# Altium PCB SIMPTON_PCB.PcbDoc
Units mm, origin at the board's own origin, x right, y up, seen from the top; angles counter-clockwise.
Board outline 97.8 x 50 mm, 2 copper layers (Top Layer, Bottom Layer); 60 components, 50 nets, 233 pads, 475 vias.
Unrouted connection lines stored in the file: 144.
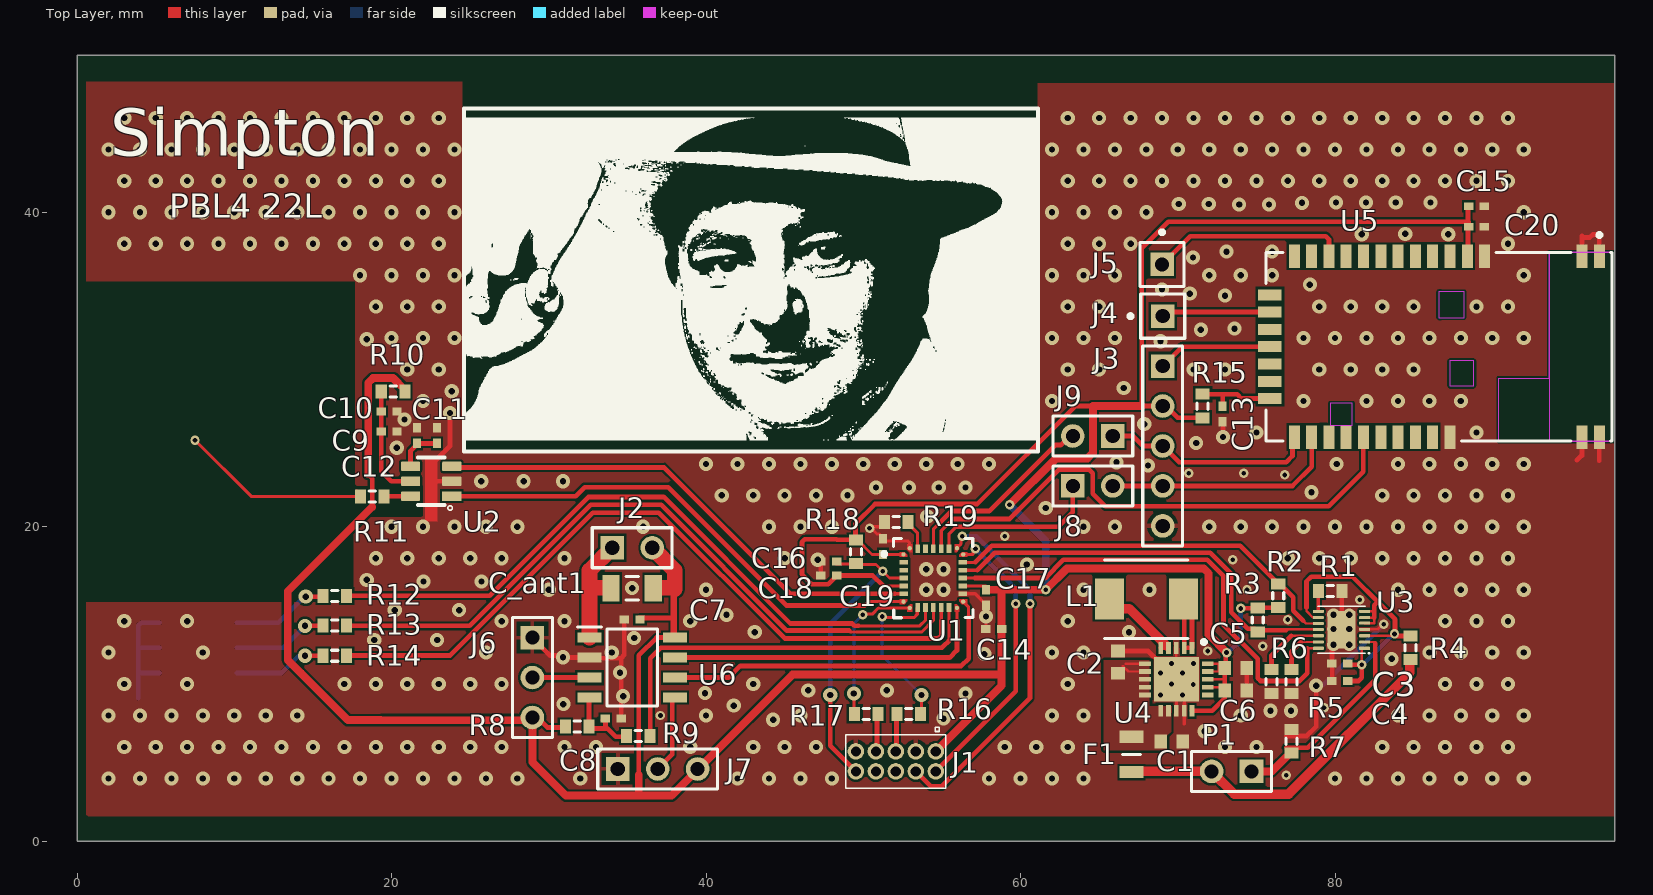
[diagram p0: Top Layer view]
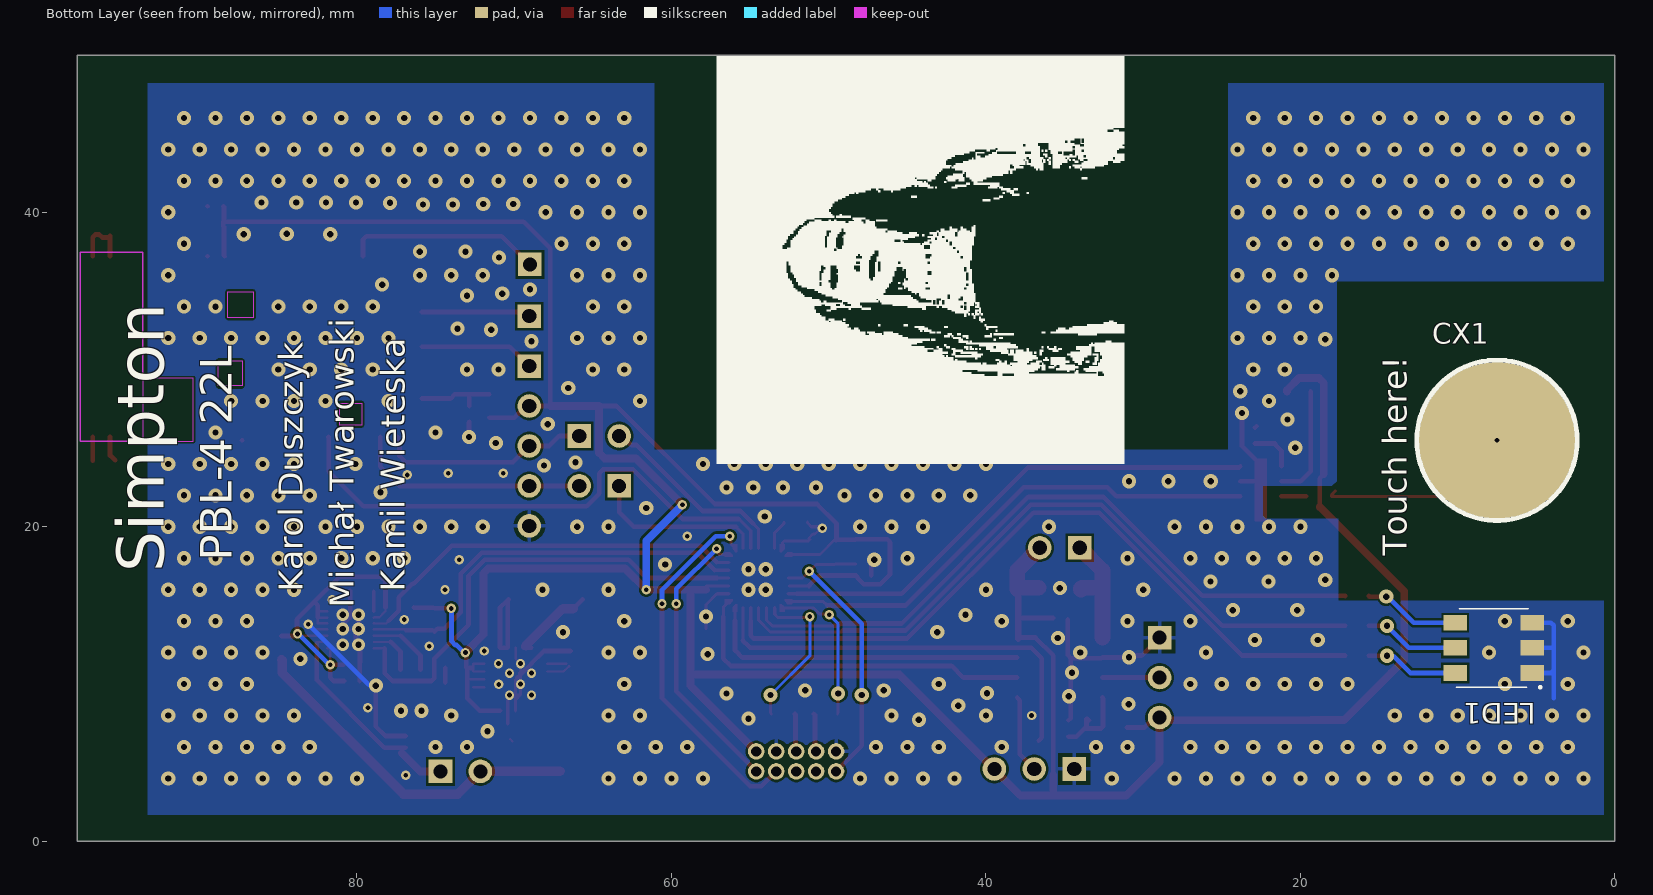
[diagram p1: Bottom Layer view, seen from below]

## Layer stack, top to bottom
Top Solder: solder mask 0.0102, Solder Resist, Dk 3.5
Top Layer: signal copper 0.0356
Dielectric 1: dielectric 0.32, FR-4, Dk 4.8
Bottom Layer: signal copper 0.0356
Bottom Solder: solder mask 0.0102, Solder Resist, Dk 3.5

## Board outline
0,0 0,50 97.8,50 97.8,0

## Design rules (kind name [scope] priority, off if disabled: settings)
Clearance [All] p1: gap=0.15 ignorepadtopadclearanceinfootprint=TRUE except(0: Arc-Hole Track-Hole SMDPad-Hole THPad-Hole Via-Hole Fill-Hole Poly-Hole Region-Hole Text-Hole)
PolygonConnect [All] p1: thpad.connectstyle=Relief thpad.reliefconductorwidth=0.254 thpad.reliefentries=4 thpad.polygonreliefangle="90 Angle" thpad.airgapwidth=0.254 smdpad.connectstyle=Direct smdpad.reliefconductorwidth=0.254 smdpad.reliefentries=4 smdpad.polygonreliefangle="90 Angle" smdpad.airgapwidth=0.254 via.connectstyle=Direct via.reliefconductorwidth=0.254 via.reliefentries=4 via.polygonreliefangle="90 Angle" via.airgapwidth=0.254
RoutingVias [All] p1: holewidth=0.711 width=1.27 viastyle="Through Hole" minholewidth=0.711 minwidth=1.27 maxholewidth=0.711 maxwidth=1.27
SolderMaskExpansion [All] p1: expansion=0.102 istentingtop=FALSE
Width [All] p1: maxlimit=1 minlimit=0.15 preferedwidth=0.3 minimp=50.000000 maximp=50.000000 favimp=50.000000
30 further rules are at their usual default settings.

## Components (designator, comment, footprint, x,y, rotation, side; value= is the part's Value field where it differs from the comment)
C1 "Cap Semi" 1608[0603] 69.61,6.35 r0 top value=10u
C2 "Cap Semi" 1608[0603] 66.2,11.4 r90 top value=10u
C3 "Cap Semi" 0402 80.3,11.3 r180 top value=100n
C4 "Cap Semi" 0402 80.3,10.2 r180 top value=470n
C5 "Cap Semi" 1608[0603] 73.685,11.025 r0 top value=22u
C6 "Cap Semi" 1608[0603] 73.675,9.6 r0 top value=22u
C7 "Cap Semi" 0402 35.3,14.1 r0 top value=100n
C8 "Cap Semi" 0402 34.1,7.8 r180 top value=220n
C9 "Cap Semi" 0402 19.845,26.072 r0 top value=1u
C10 "Cap Semi" 0402 19.845,27.341 r0 top value=100p
C11 "Cap Semi" 0402 22.895,25.8 r90 top value=1u
C12 "Cap Semi" 0402 21.625,25.8 r90 top value=100p
C13 "Cap Semi" 0402 72.85,27.18 r270 top value=1u
C14 "Cap Semi" 0402 58.3,13.5 r180 top value=2u2
C15 "Cap Semi" 0402 89,40.385 r0 top value=1u
C16 "Cap Semi" 0402 47.8,17.8 r180 top value=100n
C17 "Cap Semi" 0402 57.8,15.5 r270 top value=100n
C18 "Cap Semi" 0402 47.8,16.9 r180 top value=100n
C19 "Cap Semi" 0402 51.255,18.74 r90 top value=100n
C20 "Cap Semi" 0402 89,39.085 r0 top value=100n
C_ant1 "Cap Semi" C1206 35.3,16.1 r180 top value=100p
CX1 "KD_electrode" KD_ELECTRODE 7.5,25.5 r0 bottom
F1 "MF-PSHT010KX-2" FUSC2214X120N 67.05,5.525 r90 top
J1 "JTAG header" KD_JTAG_header 52.07,5.08 r180 top
J2 "ANTENNA" HDR1X2 34.036,18.669 r0 top
J3 "Header 5" HDR1X5 69.04,30.22 r270 top
J4 "Pad" PIN1 69.04,33.395 r90 top
J5 "Pad" PIN1 69,36.685 r0 top
J6 "Zworka SPEED" HDR1X3 28.956,12.954 r270 top
J7 "Zworka MODE" HDR1X3 34.385,4.6 r0 top
J8 "Zworka TX" HDR1X2 63.325,22.6 r0 top
J9 "Zworka RX" HDR1X2 65.865,25.775 r180 top
L1 "MPX1D0520L1R0" INDPM5350X200N 68,15.4 r180 top
LED1 "RGB LED PLCC-6" 5050 7.7,12.3 r180 bottom
P1 "BATT" HDR1X2 74.69,4.445 r180 top
R1 "Res3" J1-0603 79.685,15.925 r0 top value=100k
R2 "Res3" J1-0603 76.385,15.625 r270 top value=1k2
R3 "Res3" J1-0603 75.085,14.075 r90 top value=1k2
R4 "Res3" J1-0603 84.8,12.3 r90 top value=10
R5 "Res3" J1-0603 77.23,10.16 r270 top value=100k
R6 "Res3" J1-0603 75.96,10.16 r90 top value=100k
R7 "Res3" J1-0603 77.23,6.35 r90 top value=20m
R8 "Res3" J1-0603 31.8,7.3 r180 top value=100k
R9 "Res3" J1-0603 35.7,6.7 r180 top value=19k
R10 "Res3" J1-0603 20.095,28.611 r0 top value=42R2
R11 "Res3" J1-0603 18.77,21.932 r180 top value=470
R12 "Res3" J1-0603 16.4,15.6 r180 top value=110
R13 "Res3" J1-0603 16.4,13.716 r180 top value=160
R14 "Res3" J1-0603 16.4,11.8 r180 top value=80
R15 "Res3" J1-0603 71.58,27.68 r270 top value=4k7
R16 "Res3" J1-0603 52.9,8.1 r0 top value=100
R17 "Res3" J1-0603 50.2,8.1 r180 top value=100
R18 "Res3" J1-0603 49.53,18.415 r270 top value=100k
R19 "Res3" J1-0603 52.1,20.3 r0 top value=100k
U1 "STM32L031G6U7" FP-UFQFPN28-A0B0-MFG 54.455,16.74 r0 top
U2 "IQS227AS/B" KD_TSOT23-6 22.52,22.897 r90 top
U3 "MAX17201G+" KW_TDFN14 80.41,13.45 r180 top
U4 "ISL91110IRNZ-T7A" QFN50P400X400X100-21N 69.91,10.3 r270 top
U5 "RN4870-V/RM118" FP-RN4870-V-RM118-MFG 86.61,31.455 r270 top
U6 "MLX90109CDC-AAA-000-SP" SOIC127P600X172-8N 35.306,11.049 r0 top

## Footprints (in the part's own frame and the unit in brackets; to place one, negate y for a bottom-side part, rotate by r counter-clockwise, add the part's x,y. Pads: shape width x height; smd on the part's side, far side on the other; paste and mask are expansions set on the pad)
0402 [mm] "Chip Capacitor, Body 1.0x0.5mm, IPC High Density"
  rect 0.6x0.5 smd: 1(-0.5,0) 2(0.5,0)
  body extent -0.55,-0.3 0.55,0.3, height 1.3
1608[0603] [mm] "Chip Capacitor, Body 1.6x0.8mm, IPC High Density"
  rect 0.8x0.9 smd: 1(-0.7,0) 2(0.7,0)
  body extent -0.87,-0.48 0.87,0.48, height 1.3
5050 [mm]
  rect 1.5x1 smd: 1(2.45,-1.6) 2(2.45,0) 3(2.45,1.6) 4(-2.45,1.6) 5(-2.45,0) 6(-2.45,-1.6)
  silkscreen extent -2.4,-2.55 3,2.5, body extent -2.5,-2.5 2.5,2.5, height 2.1
C1206 [mm] "Chip Capacitor, Body 3.2x1.6mm, IPC High Density"
  rect 1.1x1.7 smd: 1(-1.35,0) 2(1.35,0)
  silkscreen extent -0.4,-0.75 0.4,0.75, body extent -1.7,-0.9 1.7,0.9, height 1.3
FP-RN4870-V-RM118-MFG [mm]
  rect 1.5x0.7 smd paste+0 mask+0: 1(-5.75,10.2) 2(-5.75,9.1) 3(-5.75,2.9) 4(-5.75,1.8) 5(-5.75,0.7) 6(-5.75,-0.4) 7(-5.75,-1.5) 8(-5.75,-2.6) 9(-5.75,-3.7) 10(-5.75,-4.8) 11(-5.75,-5.9) 12(-5.75,-7) 13(-5.75,-8.1) 14(-5.75,-9.2) 22(5.75,-9.2) 23(5.75,-8.1) 24(5.75,-7) 25(5.75,-5.9) 26(5.75,-4.8) 27(5.75,-3.7) 28(5.75,-2.6) 29(5.75,-1.5) 30(5.75,-0.4) 31(5.75,0.7) 32(5.75,9.1) 33(5.75,10.2)
  rect 0.7x1.5 smd paste+0 mask+0: 15(-3.3,-10.75) 16(-2.2,-10.75) 17(-1.1,-10.75) 18(0,-10.75) 19(1.1,-10.75) 20(2.2,-10.75) 21(3.3,-10.75)
  Keep-Out Layer region: -6,7 6,7 6,11 -6,11
  Keep-Out Layer region: -3.5,0 -1.85,0 -1.85,1.6 -3.5,1.6
  Keep-Out Layer region: 3.6,-6.9 5,-6.9 5,-5.5 3.6,-5.5
  Keep-Out Layer region: 0.9,0.7 2.5,0.7 2.5,2.2 0.9,2.2
  Keep-Out Layer region: -6,11 6,11 6,3.8 2,3.8 2,7 -6,7 -6,11
  silkscreen extent -7.22,-11 6,11, body extent -6.6,-11.6 6.6,11.1, height 0.25
FP-UFQFPN28-A0B0-MFG [mm]
  round 0.27 smd paste+0 mask+0: 1(-1.9,1.5) 7(-1.9,-1.5) 8(-1.5,-1.9) 14(1.5,-1.9) 15(1.9,-1.5) 21(1.9,1.5) 22(1.5,1.9) 28(-1.5,1.9)
  rect 0.55x0.3 smd paste+0 mask+0: 2(-1.875,1) 3(-1.875,0.5) 4(-1.875,0) 5(-1.875,-0.5) 6(-1.875,-1) 16(1.875,-1) 17(1.875,-0.5) 18(1.875,0) 19(1.875,0.5) 20(1.875,1)
  rect 0.3x0.55 smd paste+0 mask+0: 9(-1,-1.875) 10(-0.5,-1.875) 11(0,-1.875) 12(0.5,-1.875) 13(1,-1.875) 23(1,1.875) 24(0.5,1.875) 25(0,1.875) 26(-0.5,1.875) 27(-1,1.875)
  Top Layer region: -1.65,1.35 -1.65,1.48 -1.82,1.65 -2.15,1.65 -2.15,1.35 -1.65,1.35
  Top Layer region: -1.35,1.65 -1.48,1.65 -1.65,1.82 -1.65,2.15 -1.35,2.15 -1.35,1.65
  Top Layer region: -1.65,-1.35 -1.65,-1.48 -1.82,-1.65 -2.15,-1.65 -2.15,-1.35 -1.65,-1.35
  Top Layer region: 1.35,-1.65 1.48,-1.65 1.65,-1.82 1.65,-2.15 1.35,-2.15 1.35,-1.65
  Top Layer region: 1.65,-1.35 1.65,-1.48 1.82,-1.65 2.15,-1.65 2.15,-1.35 1.65,-1.35
  Top Layer region: 1.65,1.35 1.65,1.48 1.82,1.65 2.15,1.65 2.15,1.35 1.65,1.35
  Top Layer region: 1.35,1.65 1.48,1.65 1.65,1.82 1.65,2.15 1.35,2.15 1.35,1.65
  Top Layer region: -1.35,-1.65 -1.48,-1.65 -1.65,-1.82 -1.65,-2.15 -1.35,-2.15 -1.35,-1.65
  silkscreen extent -3.25,-2.52 2.52,2.52, body extent -2.25,-2.25 2.25,2.25, height 0.25
FUSC2214X120N [mm]
  rect 0.77x1.52 smd: 1(-1.125,0) 2(1.125,0)
  silkscreen extent 0,-0.58 0,0.58, body extent -1.07,-0.67 1.07,0.67, height 1.2
HDR1X2 [mm] "Connector; Header; 2 Position"
  rect 1.5x1.5 hole 0.9: 1(0,0)
  round 1.5 hole 0.9: 2(2.54,0)
  silkscreen extent -1.27,-1.27 3.81,1.27
HDR1X3 [mm] "Connector; Header; 3 Position"
  rect 1.5x1.5 hole 0.9: 1(0,0)
  round 1.5 hole 0.9: 2(2.54,0) 3(5.08,0)
  silkscreen extent -1.27,-1.27 6.35,1.27
HDR1X5 [mm] "Connector; Header; 5 Position"
  rect 1.5x1.5 hole 0.9: 1(0,0)
  round 1.5 hole 0.9: 2(2.54,0) 3(5.08,0) 4(7.62,0) 5(10.16,0)
  silkscreen extent -1.27,-1.27 11.43,1.27
INDPM5350X200N [mm]
  rect 1.85x2.6 smd: 1(-2.35,0) 2(2.35,0)
  silkscreen extent -2.65,-2.5 2.65,2.5, body extent -2.75,-0.04 2.75,1.96, height 2.6
J1-0603 [mm] "Chip Resistor, Body 1.6x0.8mm, IPC High Density"
  rect 0.7x0.9 smd: 1(-0.75,0) 2(0.75,0)
  silkscreen extent -0.2,-0.35 0.2,0.35, body extent -0.85,-0.48 0.85,0.48, height 0.9
KD_ELECTRODE [mm]
  round 10 smd: CX(0,0)
  silkscreen extent -5.1,-5.1 5.1,5.1
KD_JTAG_header [mm]
  round 1.05 hole 0.65: 1(-2.54,-0.635) 2(-2.54,0.635) 3(-1.27,-0.635) 4(-1.27,0.635) 5(0,-0.635) 6(0,0.635) 7(1.27,-0.635) 8(1.27,0.635) 9(2.54,-0.635) 10(2.54,0.635)
  silkscreen extent -3.18,-2.16 3.18,1.7
KD_TSOT23-6 [mm]
  rect 0.62x1.22 smd: 1(-0.95,-1.31)
  rrect25% 0.62x1.22 smd: 2(0,-1.31) 3(0.95,-1.31) 4(0.95,1.31) 5(0,1.31) 6(-0.95,1.31)
  silkscreen extent -1.84,-1.34 1.5,0.85
KW_TDFN14 [mm]
  rrect50% 0.7x0.2 smd: 1(-1.475,1.175) 2(-1.475,0.775) 3(-1.475,0.375) 4(-1.475,-0.025) 5(-1.475,-0.425) 6(-1.475,-0.775) 7(-1.475,-1.175) 8(1.475,1.175) 9(1.475,0.775) 10(1.475,0.375) 11(1.475,-0.025) 12(1.475,-0.4) 13(1.475,-0.775) 14(1.475,-1.175)
  rrect10% 1.8x2.4 smd: 15(0,0)
  silkscreen extent -1.79,-1.5 1.5,1.54
PIN1 [mm] "Connector; Plug"
  rect 1.5x1.5 hole 0.9: 1(0,0)
  silkscreen extent -1.4,-1.4 1.4,2.17
QFN50P400X400X100-21N [mm]
  rect 0.75x0.3 smd: 1(-2,1) 2(-2,0.5) 3(-2,0) 4(-2,-0.5) 5(-2,-1) 11(2,-1) 12(2,-0.5) 13(2,0) 14(2,0.5) 15(2,1)
  rect 0.3x0.75 smd: 6(-1,-2) 7(-0.5,-2) 8(0,-2) 9(0.5,-2) 10(1,-2) 16(1,2) 17(0.5,2) 18(0,2) 19(-0.5,2) 20(-1,2)
  rect 2.85x2.85 smd: 21(0,0)
  silkscreen extent -2.5,1.63 -2.25,1.88, body extent -2.05,-2.05 2.05,2.05, height 1
SOIC127P600X172-8N [mm]
  rect 1.525x0.65 smd: 1(-2.712,1.905) 2(-2.712,0.635) 3(-2.712,-0.635) 4(-2.712,-1.905) 5(2.712,-1.905) 6(2.712,-0.635) 7(2.712,0.635) 8(2.712,1.905)
  silkscreen extent -3.47,-2.44 1.6,2.58, body extent -3,-2.44 3,2.44, height 1.72

## Part data
C1 C2 C3 C4 C5 C6 C7 C8 C9 C10 C11 C12 C13 C14 C15 C16 C17 C18 C19 C20 C_ant1: "Capacitor (Semiconductor SIM Model)", LatestRevisionDate=29-May-2009, LatestRevisionNote="IPC-7351 Footprint Added.", PackageDescription="Chip Capacitor", PackageReference=C1206, Published=8-Jun-2000, Publisher="Altium Limited"
F1: "Fuse", Arrow Part Number=MF-PSHT050KX-2, Manufacturer_Name=Bourns, Mouser Part Number=652-MF-PSHT050KX-2, Arrow Price/Stock=https://www.arrow.com/en/products/mf-psht050kx-2/bourns?region=nac, Datasheet Link=https://www.bourns.com/docs/product-datasheets/mfpsht.pdf, Height=1.2mm, Manufacturer_Part_Number=MF-PSHT050KX-2, Mouser Price/Stock=https://www.mouser.co.uk/ProductDetail/Bourns/MF-PSHT050KX-2?qs=XeJtXLiO41SgKAEP4Z5Pjw%3D%3D
J1: library part KD_JTAG_connector, "Connector"
J2 J8 J9 P1: library part "Header 2", "Header, 2-Pin", LatestRevisionDate=17-Jul-2002, LatestRevisionNote="Re-released for DXP Platform.", Publisher="Altium Limited"
J3: "Header, 5-Pin", LatestRevisionDate=17-Jul-2002, LatestRevisionNote="Re-released for DXP Platform.", Publisher="Altium Limited"
J4 J5: library part Socket, LatestRevisionDate=17-Jul-2002, LatestRevisionNote="Re-released for DXP Platform.", Publisher="Altium Limited"
J6 J7: library part "Header 3", "Header, 3-Pin", LatestRevisionDate=17-Jul-2002, LatestRevisionNote="Re-released for DXP Platform.", Publisher="Altium Limited"
L1: library part KD_cewka
LED1: library part KD_PLCC-6
R1 R2 R3 R4 R5 R6 R7 R8 R9 R10 R11 R12 R13 R14 R15 R16 R17 R18 R19: "Resistor", LatestRevisionDate=29-May-2009, LatestRevisionNote="IPC-7351 Footprint Added.", PackageDescription="Chip Resistor", PackageReference=J1-0603, Published=8-Jun-2000, Publisher="Altium Limited"
U1: library part CMP-12105-000084-1, "IC MCU 32BIT 32KB FLASH 28UFQFPN", Frequency=32MHz, Max Operating Temperature=105°C, Max Power Dissipation=167mW, Max Supply Voltage=3.6V, Min Operating Temperature=-40°C, Min Supply Voltage=1.8V, Operating Supply Voltage=3.3V, Core Architecture=ARM, Interface=I2C, Lead Free="Lead Free", Max Frequency=32MHz, Memory Size=32KB, Memory Type=FLASH, Mount="Surface Mount", Number of I/Os=21, Number of Pins=28, Number of Programmable I/O=21, Number of Timers/Counters=4, Oscillator Type=Internal, Peripherals="Brown-out Detect/Reset", RAM Size=1KB, Watchdog Timer=Yes
U2: library part KD_IQS227AS/B
U4: "LED", Manufacturer_Name="Renesas Electronics", Mouser Part Number=968-ISL91110IRNZ-T7A, Datasheet Link=https://datasheet.datasheetarchive.com/originals/distributors/Datasheets_SAMA/d3e5c1b0a1d99c18e56c54f82b79d217.pdf, Height=1mm, Manufacturer_Part_Number=ISL91110IRNZ-T7A, Mouser Price/Stock=https://www.mouser.co.uk/ProductDetail/Renesas-Intersil/ISL91110IRNZ-T7A?qs=vyIerDHf%2Fmmihws9YL5pdg%3D%3D
U5: library part CMP-06331-000050-1, "RX TXRX MOD BLE 5.0 CHIP SMD", Case/Package=Module, Max Operating Temperature=70°C, Max Supply Voltage=3.6V, Min Operating Temperature=-20°C, Min Supply Voltage=1.9V, Lead Free="Lead Free", REACH SVHC="No SVHC", RoHS Compliant=No
U6: "Hardware", Manufacturer_Name=Melexis, Mouser Part Number=482-90109CDCAAA000SP, Datasheet Link=https://www.melexis.com/-/media/files/documents/datasheets/mlx90109-datasheet-melexis.pdf, Height=1.72mm, Manufacturer_Part_Number=MLX90109CDC-AAA-000-SP, Mouser Price/Stock=https://www.mouser.co.uk/ProductDetail/Melexis/MLX90109CDC-AAA-000-SP?qs=KuGPmAKtFKVJWBIJMV%252B4%252Bg%3D%3D

## Via types
v1: diameter 0.9, hole 0.4, Top Layer to Bottom Layer, tented both sides, 432 vias
v2: diameter 0.6, hole 0.3, Top Layer to Bottom Layer, tented both sides, 29 vias
v3: diameter 0.6, hole 0.3, Top Layer to Bottom Layer, tented bottom, 8 vias
v4: diameter 0.8, hole 0.4, Top Layer to Bottom Layer, tented both sides, 6 vias

## Nets (pads, with @x,y where several pads share a name; then routed paths per layer and width w, separated by ;. In a path a pad name is that pad's centre, name@x,y a point inside that pad or via, vN(x,y) a via of type N, cw(c..) or ccw(c..) an arc to the next point about the centre after c; other vN are vias at no path point)
3V3: C5.1 C6.1 C7.2 C14.1 C15.1 C17.1 C18.1 C19.1 C20.1 C_ant1.1 J1.1 J2.2 J3.2 J6.3 J7.3 R2.2 R3.2 R8.2 R10.2 R15.2 R18.1 U1.1 U1.5 U1.17 U4.15 U4.17 U4.18 U4.19 U4.20 U5.4 U6.8 | length 243.2
  Top Layer w0.15: U4.17 C6.1@72.6,9.8 ; U4.18 72.985,10.3 ; U4.19 72.6,10.8 72.6,11.3 U4.20
  Top Layer w0.2: R18.1 49.63,19.165 50.555,18.24 U1.1@52.48,18.24 ; 51.255,16.24 U1.5@52.505,16.24 ; U1.17 C17.1@57.8,16.24
  Top Layer w0.3: 18.52,23.342 18.77,23.092 18.77,21.27 ; J6.3 29.28,7.874 29.915,7.239 R8.2@31.05,7.239 ; 35.721,4.222 35.721,11.821 36.854,12.954 U6.8 U6.8@37.945,12.881 ; C7.2@35.735,14.2 37.945,14.2 ; 37.932,16.129 37.945,16.115 38.018,16.043 ; C18.1@48.15,16.8 48.25,16.9 50.595,16.9 51.255,16.24 ; C18.1@48.187,16.763 47.774,16.35 46.726,16.35 46.1,16.976 46.1,19.024 46.276,19.2 48.3,19.2 48.318,19.182 R18.1@49.513,19.182 ; R18.1 R18.1@49.513,19.182 ; 64.6,27.68 63.48,27.68 57.25,21.45 50.75,21.45 49.5,20.2 49.5,19.195 R18.1@49.513,19.182 ; U4.15 72.195,8.3 72.985,9.09 72.985,10.3 C5.1 ; R15.2 69.987,26.93 69.237,27.68 J3.2 67.7,27.68 67.7,37.7 69.4,39.4 88.5,39.4 C20.1 ; C5.1@72.7,11.025 C5.1 ; v2(73.1,12) 73.043,11.943 73.043,11.082 C5.1 ; v2(74,14.81) 74.007,14.817 75.077,14.817 75.11,14.85 76.36,14.85 R2.2 ; U5.4 88.455,37.25 C20.1@88.455,39.085 ; 88.455,39.4 88.455,40.34 C15.1
  Top Layer w0.4: U6.8@37.945,12.881 37.945,14.2 37.945,16.115
  Top Layer w0.5: 18.52,23.342 18.52,29.152 18.829,29.462 20.095,29.462 20.845,28.712 R10.2 ; 18.77,21.27 13.4,15.9 13.4,11.532 14.232,10.7 17.226,7.705 19.295,7.705 19.3,7.7 28.782,7.7 J6.3 28.956,5.044 31.096,2.904 37.804,2.904 45.5,10.6 58.74,10.6 58.8,10.54 ; 35.721,3.104 35.721,4.222 ; J1.1 58.8,9.905 58.8,10.54 ; C17.1 58.8,16 v2(61.6,16) 62.95,17.35 71.65,17.35 71.96,17.04 71.96,13.15 73.1,12.01 v2(73.1,12) ; 58.8,15.983 C14.1 58.8,10.54 ; v2(59.3,21.4) 62.25,24.35 64.25,24.35 64.6,24.7 64.6,27.68 67.7,27.68
  Top Layer w1: J2.2 38.018,17.227 38.018,16.043 ; C_ant1.1@36.656,16.129 37.932,16.129
  Bottom Layer w0.3: v2(73.1,12) 73.181,12 73.663,12.482 73.742,12.482 73.985,12.725 73.985,14.795 v2(74,14.81)
  Bottom Layer w0.5: J6.3@28.764,8.065 J6.3 ; v2@59.319,21.381 61.6,19.1 v2(61.6,16)
GND: C1.2 C2.2 C3.2 C4.2 C5.2 C6.2 C7.1 C8.1 C9.2 C10.2 C11.2 C12.2 C13.2 C14.2 C15.2 C16.2 C17.2 C18.2 C19.2 C20.2 J1.3 J1.9 J3.5 J6.1 J7.1 LED1.1 LED1.2 LED1.3 R1.2 R5.2 R6.1 R7.2 R19.1 U1.16 U1.28 U2.2 U3.4 U3.15 U4.3 U4.13 U4.14 U4.21 U5.1 U5.2 U5.3 U5.31 U5.32 U5.33 U6.2 | length 77.2
  Top Layer w0.15: U4.21@69.6,10.7 v3(69.6,11.3) 69.91,11.61 U4.3 ; C1.2@70.11,6.35 C1.2@70.245,6.485 ; U3.15 80.625,13.45 80.675,13.5 v4(80.9,13.5) ; R1.2@80.41,15.9 R1.2 ; U3.4 82.693,13.475 v2@83.019,13.8
  Top Layer w0.2: C19.2@51.2,19.2 51.3,19.1 52.824,19.1 52.942,18.983 52.942,18.653 U1.28 ; C19.2 51.255,19.29 51.004,19.541 50.868,19.541 v2@50.508,19.9 ; R19.1 51.35,20.253 51.1,20.003 50.611,20.003 v2@50.508,19.9 ; U1.16 57.11,15.74 57.8,15.05 C17.2 v1(57.8,14.3) C14.2 ; U4.21@69.6,10.6 U4.21@69.6,9.3 ; U4.13 U4.21@69.91,9.062 ; U4.21 U4.21@69.91,9.375 ; v3(70.3,9.3) 70.076,9.3 69.838,9.062 U4.21@69.6,9.3 ; 70.41,7.475 70.41,8.975 70.242,9.142 70.142,9.142 U4.21@69.91,9.375 ; v2@50.508,19.9 v2(50.4,19.9) v2@50.508,19.9 ; U4.21@69.6,9.3 69.835,9.3 U4.21@69.91,9.375
  Top Layer w0.3: C11.2@22.795,26.4 C11.2 ; v1(23.72,27.242) 23.72,25.142 22.67,24.092 22.67,22.996 22.77,22.897 U2.2 ; J6.1 30.095,11.815 30.785,11.815 30.908,11.692 32.586,11.692 32.634,11.644 34.6,11.644 ; C8.1@34.75,7.7 34.65,7.8 C8.1 34.6,11.644 ; C7.1@34.806,14.1 34.806,11.849 34.6,11.644 ; v1(47.1,17.9) 47.2,17.9 C16.2 C18.2 ; C2.2@66.402,12.1 68.11,12.1 68.9,11.31 68.9,11.3 69.55,10.65 U4.21@69.6,10.7 ; U4.21@69.6,10.6 U4.21@69.8,10.4 ; C13.2 72.875,26.655 v1(72.875,25.71) ; 74.385,10.101 C5.2 ; 76.9,6.7 78.2,6.7 78.8,7.3 v1(78.8,9.9) ; C4.2@79.82,10.2 79.82,11.38 79.8,11.4 79.8,12.4 v4(79.9,12.5) 79.9,12.634 80.066,12.8 80.066,13.334 v4(79.9,13.5) 80,13.6 79.9,13.7 v4(79.9,14.4) ; U3.15@80.435,14.225 80.435,15.908 R1.2@80.443,15.917 ; U3.15@80.5,14.2 80.9,13.8 v4(80.9,13.5) ; v2@83.019,13.8 v2(83.1,13.8) ; U5.31@87.3,25.508 U5.31@87.305,25.503 ; C15.2 C15.2@89.505,40.38 ; U5.3@89.505,37.21 U5.3 ; 95.374,24.233 95.678,24.537 95.71,24.537 U5.32 ; 95.7,38.5 95.71,38.49 U5.2 ; 95.876,38.4 96.2,38.4 96.386,38.586 96.634,38.586 96.81,38.41 U5.1 ; 96.8,24.2 96.81,24.21 U5.33
  Bottom Layer w0.3: 3.9,9.1 3.9,10.876 ; LED1.1 4.076,10.7 3.9,10.876 ; LED1.2 3.9,12.3 ; LED1.3 4.076,13.9 3.9,13.724 3.9,12.3 ; v1(78.8,9.9) 78.857,9.957 79.257,9.957 v2(83.1,13.8) ; 3.9,10.876 3.9,12.3
  other v1: 2,4 4,4 6,4 8,4 10,4 12,4 14,4 16,4 18,4 20,4 22,4 24,4 26,4 28,4 32,4 42,4 44,4 46,4 48,4 58,4 60,4 62,4 64,4 80,4 82,4 84,4 86,4 88,4 90,4 92,4 3,6 5,6 7,6 9,6 11,6 13,6 15,6 17,6 19,6 21,6 23,6 25,6 27,6 31,6 33,6 39,6 43,6 45,6 47,6 59,6 61,6 63,6 73,6 75,6 83,6 85,6 87,6 89,6 91,6 71.7,7 44.265,7.727 55.1,7.8 2,8 4,8 6,8 8,8 10,8 12,8 14,8 40,8 46,8 62,8 64,8 74,8 84,8 86,8 88,8 90,8 92,8 75.9,8.3 77.2,8.3 41.765,8.627 30.927,8.724 34.727,9.224 56.5,9.4 39.927,9.424 46.5,9.6 51.5,9.6 3,10 7,10 17,10 19,10 21,10 23,10 25,10 27,10 43,10 63,10 87,10 89,10 91,10 34.527,10.724 83.6,11.6 30.9,11.7 57.7,11.9 2,12 8,12 26,12 34,12 62,12 64,12 86,12 88,12 90,12 92,12 18.9,12.8 22.9,12.8 35.427,12.924 43.1,13.3 66.9,13.3 3,14 7,14 27,14 31,14 39,14 63,14 87,14 89,14 91,14 41.3,14.4 20.2,14.7 24.3,14.7 30,16 40,16 54,16 55.1,16 64,16 68.2,16 84,16 86,16 88,16 90,16 92,16 35.3,16.1 22.027,16.524 25.727,16.524 18.427,16.624 54,17.3 55.1,17.3 60.4,17.6 19,18 21,18 23,18 25,18 27,18 31,18 45,18 77,18 79,18 81,18 83,18 85,18 87,18 89,18 91,18 20,20 22,20 24,20 26,20 28,20 36,20 44,20 46,20 48,20 64,20 66,20 72,20 74,20 76,20 78,20 80,20 82,20 84,20 86,20 88,20 90,20 92,20 54.063,20.655 61.6,21.2 41,22 43,22 45,22 47,22 49,22 83,22 85,22 87,22 89,22 91,22 78.5,22.2 50.802,22.494 52.902,22.494 54.802,22.494 56.502,22.494 25.7,22.9 28.4,22.9 30.9,22.9 68.1,23.9 40,24 42,24 44,24 46,24 48,24 50,24 52,24 54,24 56,24 58,24 80.1,24 84,24 86,24 88,24 90,24 92,24 66.1,24.1 20.327,25.024 71.165,25.327 75,26 89,26 67.865,26.527 20.827,26.824 22,28 62,28 78,28 82,28 84,28 86,28 88,28 23.827,28.624 66.565,28.827 21,30 23,30 63,30 65,30 71,30 73,30 79,30 81,30 83,30 85,30 68.9,31.8 18.427,31.924 20,32 22,32 24,32 62,32 64,32 66,32 78,32 80,32 82,32 84,32 86,32 88,32 90,32 92,32 71.465,32.527 73.6,32.6 19,34 21,34 23,34 63,34 65,34 79,34 81,34 83,34 85,34 89,34 91,34 73,34.7 70.765,34.827 69,35.1 78.4,35.4 18,36 20,36 22,36 24,36 62,36 64,36 66,36 72,36 74,36 76,36 92,36 70.965,37.127 73.1,37.5 76,37.5 3,38 5,38 7,38 9,38 11,38 13,38 15,38 17,38 19,38 21,38 23,38 63,38 65,38 67,38 91,38 81.7,38.6 87.2,38.6 84.465,38.627 2,40 4,40 6,40 8,40 10,40 12,40 14,40 16,40 18,40 20,40 22,40 24,40 62,40 64,40 66,40 68,40 92,40 73.9,40.5 75.8,40.5 70.065,40.527 71.965,40.527 77.9,40.6 80.065,40.627 81.965,40.627 83.865,40.627 86.065,40.627 3,42 5,42 7,42 9,42 11,42 13,42 15,42 17,42 19,42 21,42 23,42 63,42 65,42 67,42 69,42 71,42 73,42 75,42 77,42 79,42 81,42 83,42 85,42 87,42 89,42 91,42 2,44 4,44 6,44 8,44 10,44 12,44 14,44 16,44 18,44 20,44 22,44 24,44 62,44 64,44 66,44 68,44 70,44 72,44 74,44 76,44 78,44 80,44 82,44 84,44 86,44 88,44 90,44 92,44 3,46 5,46 7,46 9,46 11,46 13,46 15,46 17,46 19,46 21,46 23,46 63,46 65,46 67,46 69,46 71,46 73,46 75,46 77,46 79,46 81,46 83,46 85,46 87,46 89,46 91,46
  other v2: 76.9,4.2 37.1,8 79.3,8.5 71.9,12.1 75.4,12.4 77,14.1 81.563,15.355 74.4,16 73.5,17.9 59,19.4 76.8,23.3 70.7,23.4 74.2,23.4
  other v3: 68.9,9.3 70.985,9.975 69.6,10 68.9,10.7 70.3,10.7 71,11.3
  other v4: 80.9,12.5 80.9,14.4
GPIO_BLE_TX_IND: U1.24 U5.26 | length 34.5
  Top Layer w0.2: U1.24 54.955,19.755 55.682,20.482 55.718,20.482
  Top Layer w0.3: 55.718,20.482 55.736,20.5 59.301,20.5 62.275,23.474 62.451,23.65 64.35,23.65 64.6,23.4 64.6,22.1 65.4,21.3 79.6,21.3 81.8,23.5 81.8,25.695 U5.26
GPIO_BU_POUT: U1.6 U2.3 | length 32.1
  Top Layer w0.2: 52.04,15.74 U1.6
  Top Layer w0.3: U2.3 23.902,23.775 37.325,23.775 45.36,15.74 52.04,15.74
GPIO_BU_TOUT: U1.7 U2.1 | length 32.2
  Top Layer w0.2: 50.1,15 50.34,15.24 U1.7
  Top Layer w0.3: U2.1 31.722,21.947 32.287,22.513 37.588,22.513 45.1,15 50.1,15
GPIO_LED_B: R14.1 U1.12 | length 46.8
  Top Layer w0.2: 54.955,14.045 U1.12
  Top Layer w0.3: R14.1 17.161,11.811 23.711,11.811 32.8,20.9 37,20.9 45,12.9 54.779,12.9 54.955,13.076 54.955,14.045
GPIO_LED_G: R12.1 U1.10 | length 43.8
  Top Layer w0.2: 49.7,13.7 53.6,13.7 53.955,14.055 U1.10
  Top Layer w0.3: R12.1 17.171,15.621 26.248,15.621 32.527,21.9 37.3,21.9 45.35,13.85 49.286,13.85 49.436,13.7 49.7,13.7
GPIO_LED_R: R13.1 U1.11 | length 45
  Top Layer w0.2: 49.1,13.4 49.2,13.3 53.7,13.3 54.455,14.055 U1.11
  Top Layer w0.3: R13.1 17.166,13.7 24.964,13.7 32.664,21.4 37.136,21.4 45.136,13.4 49.1,13.4
GPIO_RFID_CLK: U1.15 U6.6 | length 22.9
  Top Layer w0.2: U1.15 56.7,14.895 56.7,14.3
  Top Layer w0.3: U6.6 41.439,10.414 42.175,11.15 56.235,11.15 56.7,11.615 56.7,14.3
GPIO_RFID_DATA: U1.14 U6.7 | length 20.8
  Top Layer w0.2: 55.955,14.045 U1.14
  Top Layer w0.3: U6.7 55.499,11.684 55.955,12.14 55.955,14.045
GPIO_RFID_MODU: R9.1 U1.13 | length 26.9
  Top Layer w0.2: 55.455,12.763 U1.13
  Top Layer w0.3: R9.1@36.65,6.4 36.45,6.6 R9.1 36.45,11.628 37.131,12.309 55,12.309 55.092,12.4 55.455,12.763
GPIO_ZAS_ALRT: U1.18 U3.8 | length 30.6
  Top Layer w0.15: 78.235,12.275 U3.8
  Top Layer w0.2: U1.18 57.099,16.74
  Top Layer w0.3: 57.099,16.74 61.562,16.74 62.722,17.9 71.878,17.9 72.9,16.878 72.9,13.784 75.085,11.599 75.085,10.376 75.261,10.2 77.745,10.2 78.235,10.69 78.235,12.275
NetC1_1: C1.1 C2.1 F1.2 U4.6 U4.7 U4.8 U4.9 U4.10 U4.11 U4.12 | length 2.8
  Top Layer w0.15: 66.485,11.125 66.535,11.125 66.86,10.8 U4.7 ; 66.7,11.3 U4.6
NetC3_1: C3.1 C4.1 R4.2 U3.1 U3.3 U3.5 U3.6 U3.7 U3.13 | length 23.8
  Top Layer w0.15: 78.185,14.87 78.185,14.636 78.571,14.25 78.91,14.25 U3.13 ; v2(81.7,11.229) 81.7,12.25 81.725,12.275 U3.1 ; U3.3 83.586,13.075 v2@83.698,13.187 ; U3.5 82.5,13.875 82.5,14.225 U3.6 ; U3.7 82.488,14.625 82.5,14.612 ; 82.667,15.167 82.767,15.167
  Top Layer w0.3: 78.185,14.87 78.185,16.525 78.485,16.825 81.11,16.825 82.767,15.167 83.817,14.117 83.817,13.225 v2(83.78,13.187) ; C4.1 81.5,10.2 81.7,10.4 v2(81.7,11.229) 80.871,11.229 C3.1 ; 82.5,14.225 82.5,14.612 82.5,15 82.667,15.167 ; v2@83.698,13.187 v2(83.78,13.187) ; R4.2 83.917,13.05 v2(83.78,13.187)
  Bottom Layer w0.3: v2(81.7,11.229) 81.775,11.229 83.733,13.187 v2(83.78,13.187)
NetC8_2: C8.2 R8.1 R9.2 U6.4 | length 5.2
  Top Layer w0.3: U6.4 32.55,9.1 R8.1 32.674,7.176 33.525,7.176 ; C8.2@33.45,7.7 33.55,7.8 C8.2 33.6,7.251 33.525,7.176 ; R9.2@34.77,6.65 34.25,6.65 33.724,7.176 33.525,7.176
NetC9_1: C9.1 C10.1 R10.1 U2.5 | length 7.2
  Top Layer w0.3: R10.1 C10.1 C9.1 19.345,23.532 19.98,22.897 U2.5
NetC11_1: C11.1 C12.1 U2.4 | length 2.9
  Top Layer w0.3: U2.4 21.21,24.835 21.625,25.25 C12.1 C11.1
NetC13_1: C13.1 R15.1 U5.21 | length 5.1
  Top Layer w0.3: R15.1 72.85,28.43 ; C13.1 72.85,28.43 ; U5.21 74.045,28.155 73.77,28.43 72.85,28.43
NetC16_1: C16.1 J1.10 R18.2 U1.4 | length 19.6
  Top Layer w0.2: C16.1@48.26,17.645 49.51,17.645 R18.2 49.595,17.6 50.81,17.6 51.67,16.74 U1.4
  Top Layer w0.3: v1(47.9,9.3) 47.9,6.075 J1.10
  Bottom Layer w0.3: v1(47.9,9.3) 47.9,13.83 v2(51.24,17.17) ; J1.10 J1.10@49.53,4.548
NetC_ant1_2: C_ant1.2 J2.1 U6.1 | length 7.8
  Top Layer w0.3: 32.594,16.043 32.68,16.129
  Top Layer w1: U6.1 32.594,14.859 32.594,16.043 32.594,17.227 J2.1 ; 32.68,16.129 33.9,16.129 33.95,16.079 C_ant1.2@33.95,16
NetCX1_CX: CX1.CX R11.2 | length 12.5
  Top Layer w0.2: v2(7.5,25.5) 11.068,21.932 R11.2 18.02,22.032 R11.2@17.77,22.282
NetF1_1: F1.1 P1.2 R4.1 | length 22.3
  Top Layer w0.6: F1.1@67.08,4.445 P1.2 73.595,3 77.05,3 84.764,10.714 84.764,11.514 R4.1
NetJ1_2: J1.2 U1.21 | length 18.4
  Top Layer w0.2: U1.21 56.974,18.24 56.974,18.346 57.131,18.503 v2(57.131,18.611)
  Top Layer w0.3: J1.2 59.7,9.535 v2(59.7,15.1)
  Bottom Layer w0.2: 59.69,16.053 59.7,16.043
  Bottom Layer w0.3: v2(57.131,18.611) 59.69,16.053 ; v2(59.7,15.1) 59.7,16.043
NetJ1_4: J1.4 U1.22 | length 23.5
  Top Layer w0.2: U1.22 55.955,18.659 56.223,18.927 56.223,19.323 v2(56.3,19.4)
  Top Layer w0.3: J1.4 54.285,3.5 55,3.5 60.6,9.1 v2(60.6,15.1)
  Bottom Layer w0.3: v2(56.3,19.4) 57.191,19.4 60.6,15.991 v2(60.6,15.1)
NetJ1_5: J1.5 R16.1 | length 2.4
  Top Layer w0.3: J1.5 52.11,5.755 52.11,8.06 R16.1
NetJ1_7: J1.7 R17.1 | length 2.4
  Top Layer w0.3: J1.7 50.875,5.79 50.875,8.025 R17.1
NetJ3_1: J3.1 U5.18 | length 7.3
  Top Layer w0.3: J3.1 70.275,31.455 U5.18
NetJ3_3: J3.3 J9.1 U5.22 | length 13.5
  Top Layer w0.3: J9.1 67.135,25.775 67.77,25.14 J3.3 70.079,24.101 76.891,24.101 77.295,24.505 77.295,25.19 77.41,25.305 U5.22
NetJ3_4: J3.4 J8.2 U5.23 | length 15
  Top Layer w0.3: J8.2 J3.4 77.295,22.6 78.51,23.815 U5.23
NetJ4_1: J4.1 U5.16 | length 6.9
  Top Layer w0.3: J4.1 69.3,33.655 U5.16
NetJ5_1: J5.1 U5.12 | length 12.5
  Top Layer w0.3: J5.1 70.8,38.485 79.4,38.485 79.61,38.275 U5.12
NetJ6_2: J6.2 U6.3 | length 3.6
  Top Layer w0.3: J6.2 U6.3
NetJ7_2: J7.2 U6.5 | length 5
  Top Layer w0.3: J7.2 37.846,5.521 37.846,8.972 U6.5
NetL1_1: L1.1 U4.1 U4.2 | length 6.9
  Top Layer w0.3: L1.1 L1.1@70.41,15.34 ; L1.1@70.41,15.34 70.91,14.84 U4.1 U4.2 L1.1@70.41,15.34
NetL1_2: L1.2 U4.4 U4.5 | length 5.5
  Top Layer w0.3: L1.2 L1.2@66.25,14.8 ; U4.5 U4.4@69.272,12.3 ; U4.4@69.272,12.438 69.41,12.438 U4.4
  Top Layer w0.6: L1.2@66.25,14.8 66.91,14.8 U4.4@69.272,12.438
NetLED1_4: LED1.4 R12.2 | length 6.2
  Top Layer w0.3: v1(14.54,15.56) 15.61,15.56 R12.2
  Bottom Layer w0.3: LED1.4 12.8,13.9 14.46,15.56 v1(14.54,15.56)
NetLED1_5: LED1.5 R13.2 | length 6.1
  Top Layer w0.3: v1(14.5,13.7) 15.634,13.7 R13.2
  Bottom Layer w0.3: LED1.5 13.1,12.3 v1(14.5,13.7)
NetLED1_6: LED1.6 R14.2 | length 6
  Top Layer w0.3: v1(14.5,11.8) R14.2
  Bottom Layer w0.3: LED1.6 13,10.7 14.07,11.77 14.47,11.77 v1(14.5,11.8)
NetP1_1: P1.1 R7.1 U3.2 | length 13.5
  Top Layer w0.15: U3.2 82.485,12.675 82.56,12.6
  Top Layer w0.3: 76.9,5.95 78.25,5.95 82.56,10.26 82.56,12.6 ; R7.1@77.13,5.6 R7.1
  Top Layer w0.5: P1.1 75.975,4.445 R7.1@77.13,5.6
NetR1_1: R1.1 U3.14 | length 1.3
  Top Layer w0.2: U3.14 R1.1
NetR5_1: R5.1 U3.9 | length 3.1
  Top Layer w0.15: 77.865,12.675 U3.9
  Top Layer w0.3: R5.1 77.23,12.04 77.865,12.675
NetR6_2: R6.2 U3.10 | length 4.4
  Top Layer w0.15: 77.211,13.075 U3.10
  Top Layer w0.3: R6.2 75.96,11.824 77.211,13.075
NetR11_1: R11.1 U2.6 | length 1.6
  Top Layer w0.3: R11.1@19.645,21.947 U2.6
NetR16_2: R16.2 U1.9 | length 10
  Top Layer w0.2: v2(51.2,14.29) 51.267,14.223 53.223,14.223 53.435,14.435 53.435,14.845 U1.9 ; R16.2 53.7,8.15 v1(53.7,9.3)
  Bottom Layer w0.2: v2(51.2,14.29) 51.2,11.8 v1(53.7,9.3)
NetR17_2: R17.2 U1.8 | length 9.7
  Top Layer w0.2: v1(49.4,9.4) 49.4,8.15 R17.2 ; v2(49.971,14.4) 50.019,14.449 50.571,14.449 50.962,14.84 U1.8
  Bottom Layer w0.2: v1(49.4,9.4) 49.4,13.829 v2(49.971,14.4)
NetR19_2: R19.2 U1.27 | length 1.9
  Top Layer w0.2: R19.2 52.85,20.2 53.455,19.595 U1.27
UART_BLE_RX: J9.2 U1.25 | length 12.6
  Top Layer w0.2: U1.25 54.455,19.855 54.8,20.2
  Top Layer w0.3: 54.8,20.2 55.6,21 58,21 62.2,25.2 62.549,25.2 63.124,25.775 J9.2
UART_BLE_TX: J8.1 U1.23 | length 11.1
  Top Layer w0.2: U1.23 55.455,19.555 55.9,20
  Top Layer w0.3: 55.9,20 62.4,20 63.325,20.925 J8.1
ZAS_SCL: R3.1 U1.19 U3.11 | length 26.6
  Top Layer w0.15: R3.1 R3.1@75.185,13.425 ; 76.885,13.425 76.935,13.475 U3.11
  Top Layer w0.2: U1.19 57.245,17.24
  Top Layer w0.3: 57.245,17.24 58.355,18.35 72.064,18.35 73.4,17.014 73.4,14.561 74.443,13.519 74.891,13.519 R3.1 ; R3.1@75.185,13.425 76.885,13.425
ZAS_SDA: R2.1 U1.20 U3.12 | length 25.6
  Top Layer w0.15: 77.985,14.025 78.16,13.85 U3.12 U3.12@78.91,13.875
  Top Layer w0.2: U1.20 57.109,17.74 57.129,17.761
  Top Layer w0.3: 57.129,17.761 58.169,18.8 73.96,18.8 R2.1 76.485,16.375 77.335,15.525 77.335,14.675 77.985,14.025
pads on no net: J1.6 J1.8 U1.2 U1.3 U1.26 U4.16 U5.5 U5.6 U5.7 U5.8 U5.9 U5.10 U5.11 U5.13 U5.14 U5.15 U5.17 U5.19 U5.20 U5.24 U5.25 U5.27 U5.28 U5.29 U5.30

## Polygon pours and split planes (outlines as drawn)
GND on Top Layer "GND_L01_P007" (solid, remove dead copper, pour order 7): 0.6,48.3 24.5,48.3 24.5,24.9 24.6,24.8 61,24.8 61.1,24.9 61.1,48.2 97.8,48.2 97.8,1.6 0.7,1.6 0.6,1.7 0.6,15.2 17.2,15.2 17.6,15.6 17.6,20.6 21.9,20.6 22,20.7 22,22.6 17.8,22.6 17.7,22.7 17.7,35.6 0.6,35.6
NetC1_1 on Top Layer "NETC1_1_L01_P005" (solid, remove dead copper, pour order 5): 65.3,11.5 68.2,11.5 68.2,8.6 69.6,8.6 69.6,7 69.3,6.7 69.3,5.8 65.3,5.8
GND on Top Layer "GND_L01_P002" (solid, remove dead copper, pour order 2): 69.735,5.225 69.735,8.125 69.91,8.3 70.41,8.3 70.41,7.55 70.485,7.475 72.735,7.475 72.735,7.725 73.735,8.725 73.735,9.325 74.763,9.752 77.7,9.752 77.7,6.815 75.117,5.792 72.735,5.725 70.985,5.725 70.735,5.475 70.735,5.225
GND on Top Layer "GND_L01_P003" (solid, pour order 3): 19.97,27.742 19.97,25.76 24.12,25.76 24.12,27.742
GND on Top Layer "GND_L01_P004" (solid, pour order 4): 97.8,42.985 89.2,42.985 89.2,35.985 86.8,35.985 86.8,35.785 86.8,17.785 97.8,17.785 97.8,38.185
GND on Bottom Layer "GND_L02_P006" (solid, pour order 6): 93.3,1.7 0.7,1.7 0.7,15.3 17.6,15.3 17.6,20.5 22.2,20.5 22.4,20.7 22.4,22.6 18,22.6 17.7,22.9 17.7,35.6 0.7,35.6 0.7,48.2 24.6,48.2 24.6,24.9 61.1,24.9 61.1,48.2 91.9,48.2 93.3,48.2

## Other copper
Top Layer:
  rectangle net GND: 22.12,20.342 22.92,24.342

## Silkscreen, mask and mechanical layers (free items; w line width, h text height)
Top Overlay:
  drawing of 228 lines, arcs and shapes, not listed
  text "Simpton" at 2.1,43.6 h3
  text "PBL4 22L" at 5.854,39.654 h1.52
Bottom Overlay:
  drawing of 82 lines, arcs and shapes, not listed
  text "Touch here!" at 13.254,18.154 h1.52 r270
  text "PBL-4 22L" at 87.954,17.854 h2 r270
  text "Simpton" at 92.3,17.1 h3 r270
  text "Kamil Wieteska" at 76.954,15.854 h1.52 r270
  text "Karol Duszczyk" at 83.462,15.854 h1.52 r270
  text "Michał Twarowski" at 80.208,14.854 h1.52 r270
Top Solder:
  rectangle: 52.9,14.6 56,15
  rectangle: 56.1,15.3 56.6,18.3
  rectangle: 52.9,18.4 56,18.9
  rectangle: 52.3,15.3 52.8,18.2